# EAGLE board interrupcion de bomba (EAGLE 9.0.0)
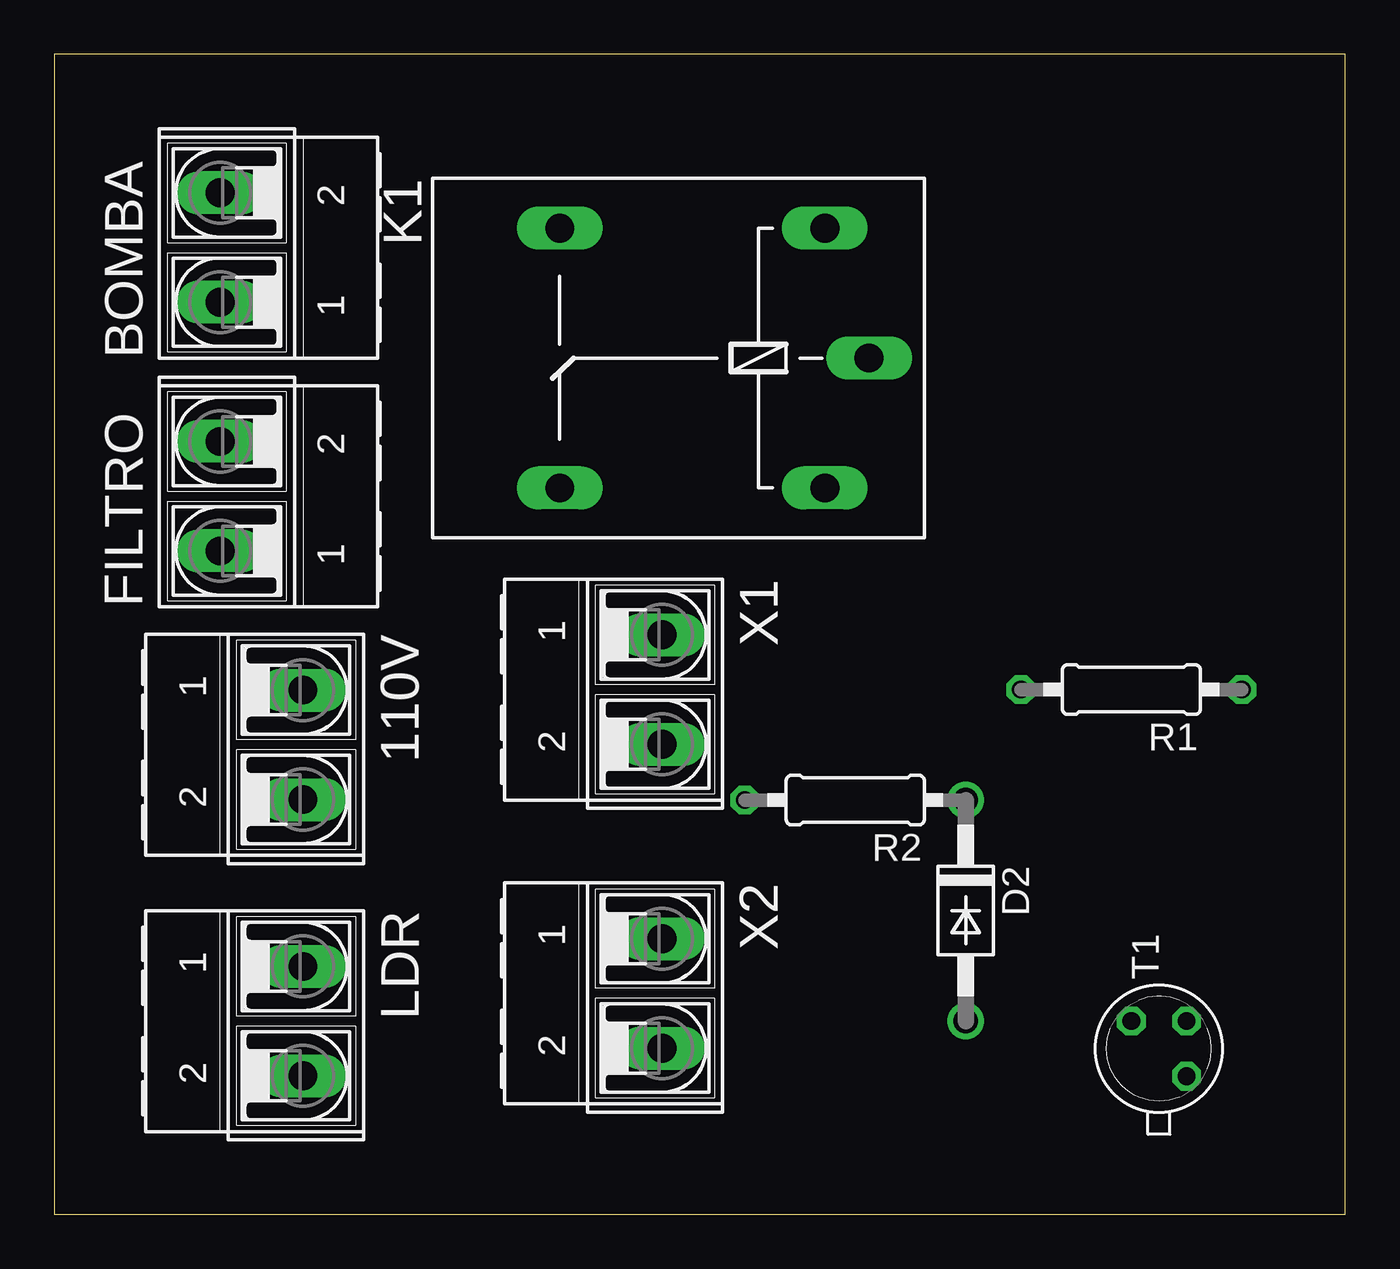
[diagram p0: board, top side]
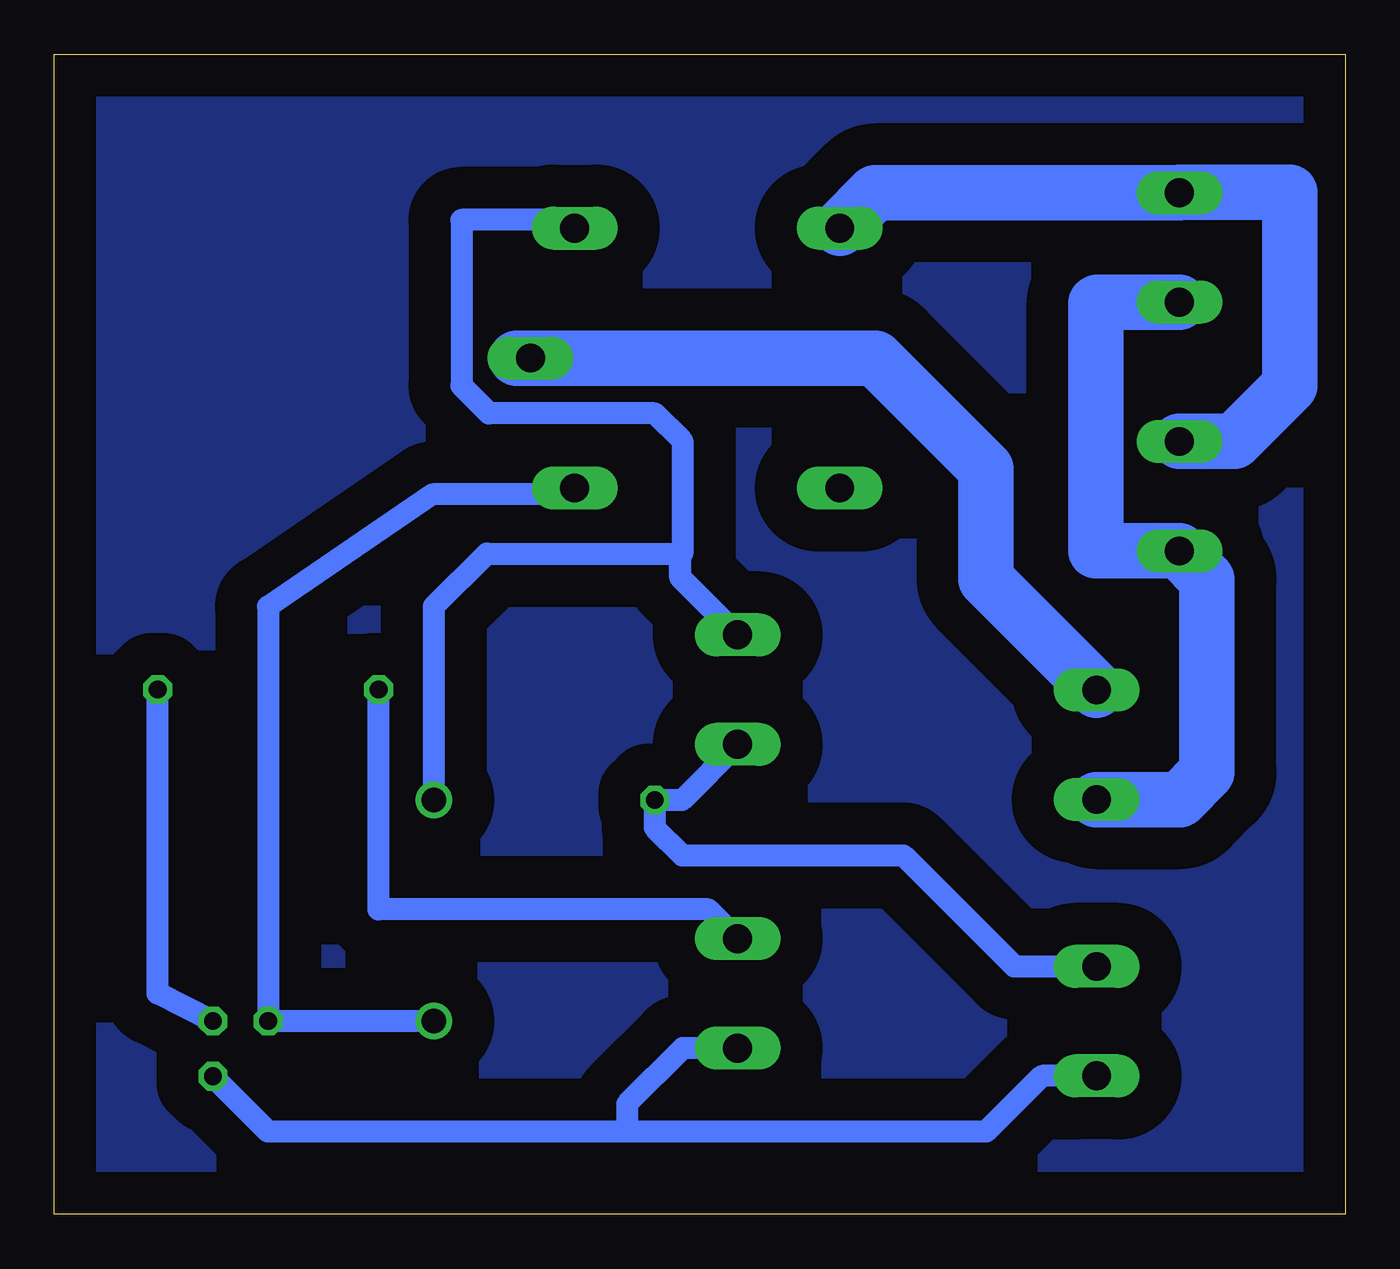
[diagram p1: board, bottom side, seen from below]

Size 59.36 x 53.33 mm. Coordinates in mm from the lower left corner, seen from the top.
Outline: 0,0 59.36,0 59.36,53.33 0,53.33 0,0
Copper layers (1*16): Top 0.035mm / dielectric 1.5mm / Bottom 0.035mm
Design rules "default": minimum track width 6mil, minimum drill 0.35mm, track to track 6mil, track to pad 6mil, pad to pad 6mil, via to via 6mil, smd to smd 6mil, copper to edge 40mil, drill to drill 6mil, minimum pad ring 10mil, minimum via ring 8mil, stop-mask expansion 4mil, vias tented up to drill 0mil, thermal gap 10mil

## Footprints (pad centres in the part's own frame; a part is rotated, then mirrored left to right if it is on the bottom)
AK500/2-H = drill 1.321 long: 1 -2.515,0; 2 2.515,0
DO41-10 = drill 1.118: A 5.08,0; C -5.08,0
G5LE = drill 1.321 long: 1 -7.493,-5.969; 2 -7.493,5.969; O 4.699,5.969; P -9.525,0; S 4.699,-5.969
0207/10 = drill 0.813 octagon: 1 -5.08,0; 2 5.08,0
TO18 = drill 0.813 octagon: 1 -1.27,-1.27; 2 1.27,-1.27; 3 1.27,1.27

## Placement (x,y rotation side)
110V  [AK500/2-H]  11.43,21.59 270 top
BOMBA  [AK500/2-H]  7.62,44.45 90 top
D2  1N4933  [DO41-10]  41.91,13.97 270 top
FILTRO  [AK500/2-H]  7.62,33.02 90 top
K1  G5L  [G5LE]  27.94,39.37 180 top
LDR  [AK500/2-H]  11.43,8.89 270 top
R1  [0207/10]  49.53,24.13 180 top
R2  [0207/10]  36.83,19.05 180 top
T1  2N2222  [TO18]  50.8,7.62 90 top
X1  [AK500/2-H]  27.94,24.13 270 top
X2  [AK500/2-H]  27.94,10.16 270 top

## Library data of the parts
110V BOMBA FILTRO LDR X1 X2 = con-ptr500; OC_FARNELL: unknown; OC_NEWARK: unknown
D2 = diode
K1 = relay; OC_FARNELL: unknown; OC_NEWARK: unknown
R1 R2 = rcl; SPICEPREFIX: R
T1 = transistor-neu-to92

## Nets
N$1: R1.1 T1.2
N$2: D2.A K1.2 T1.3
N$3: D2.C K1.1 R2.1 X1.1
N$4: 110V.1 K1.P
N$5: BOMBA.2 FILTRO.2 K1.S
N$6: R1.2 X2.1
N$7: 110V.2 BOMBA.1 FILTRO.1
N$8: LDR.2 T1.1 X2.2
N$9: LDR.1 R2.2 X1.2

## Tracks (layer width: path | path; a pad name or v marks a point on that pad's centre or on a via)
N$1
  Bottom 1.016: R1.1 54.61,10.16 T1.2
N$2
  Bottom 1.016: K1.2 35.73,33.1 41.97,33.1 49.53,27.94 T1.3 D2.A
N$3
  Bottom 0.813: 30.58,30.38 30.48,30.38 30.48,29.18 X1.1
  Bottom 1.016: 30.48,30.48 30.48,35.56 31.75,36.83 39.37,36.83 40.64,38.1 40.64,45.72 35.81,45.72 K1.1 | 30.48,30.48 30.48,30.38 | R2.1 41.91,27.94 39.47,30.38 30.58,30.38 | 30.58,30.38 30.48,30.48 | X1.1 30.58,29.29 30.58,30.38
N$4
  Bottom 1.27: 22.86,39.37 25.4,39.37 K1.P
  Bottom 2.54: 110V.1 11.43,24.13 16.51,29.21 16.51,34.29 21.59,39.37 25.4,39.37 38.1,39.37
N$5
  Bottom 2.54: K1.S 21.62,46.97 BOMBA.2 7.59,46.99 2.54,46.99 2.54,38.1 5.11,35.53 FILTRO.2
N$6
  Bottom 1.016: R1.2 44.45,14.02 29.29,14.02 X2.1
N$7
  Bottom 2.54: 110V.2 7.59,19.07 6.35,20.32 6.35,29.21 7.62,30.48 FILTRO.1 11.45,30.5 11.45,41.89 11.41,41.94 BOMBA.1
N$8
  Bottom 1.016: 11.45,6.35 LDR.2 13.95,6.38 16.51,3.81 33.02,3.81 | 33.02,3.81 49.53,3.81 T1.1 | X2.2 30.45,7.64 33.02,5.08 33.02,3.81
N$9
  Bottom 1.016: X1.2 30.51,19.05 R2.2 31.75,17.78 30.48,16.51 20.32,16.51 15.22,11.4 LDR.1
N$10
  pour Bottom (isolate 1.93): 0,0 59.69,0 59.69,53.34 0,53.34